# Altium PCB OsuBoard.PcbDoc
Units mil, origin at the board's own origin, x right, y up, seen from the top; angles counter-clockwise.
Board outline 3149.61 x 539.37 mil, 2 copper layers (Top Layer, Bottom Layer); 25 components, 20 nets, 114 pads, 53 vias.
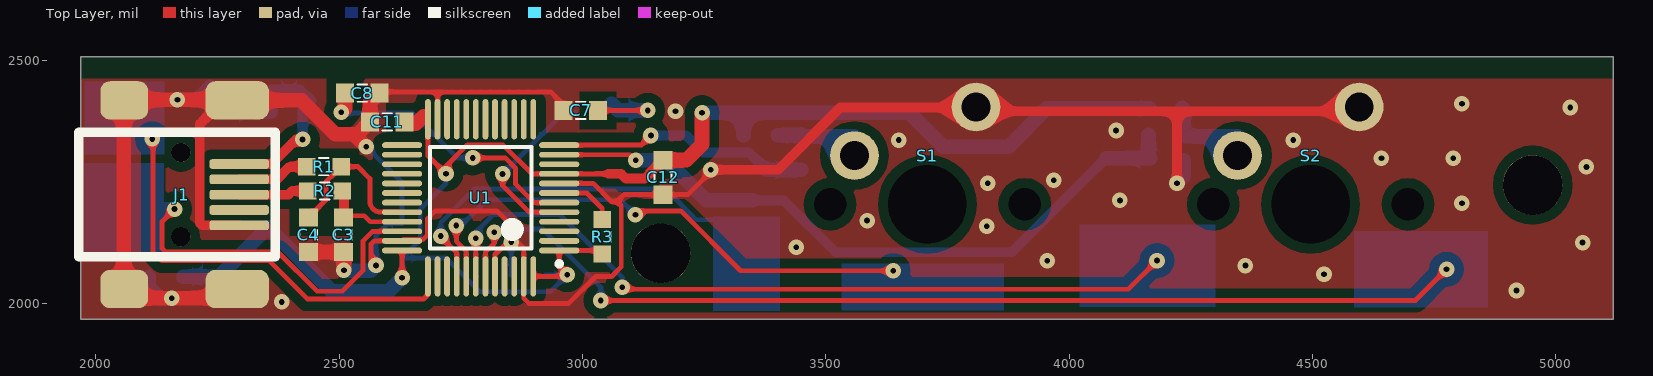
[diagram p0: Top Layer view]
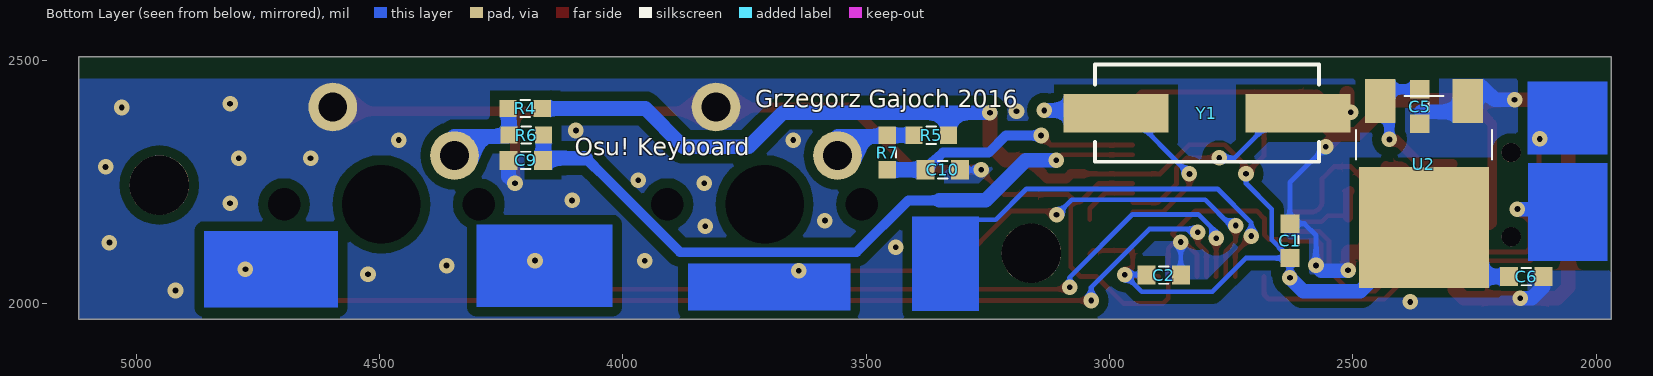
[diagram p1: Bottom Layer view, seen from below]
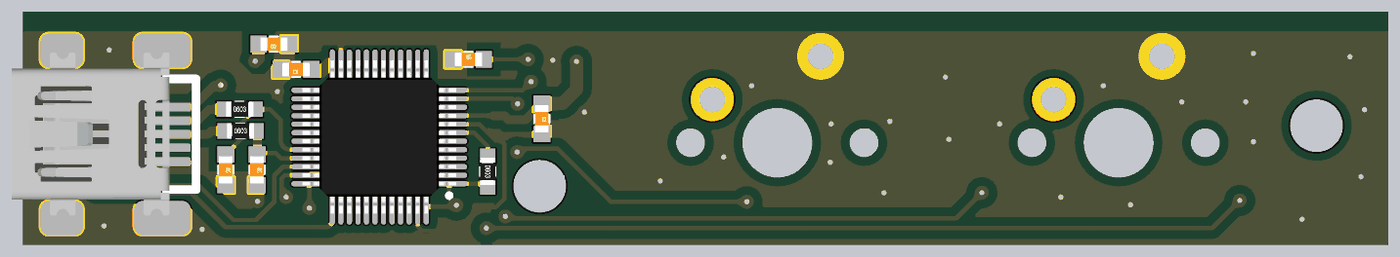
[diagram p2: 3D render of the assembled board from above, using the file's embedded part models]
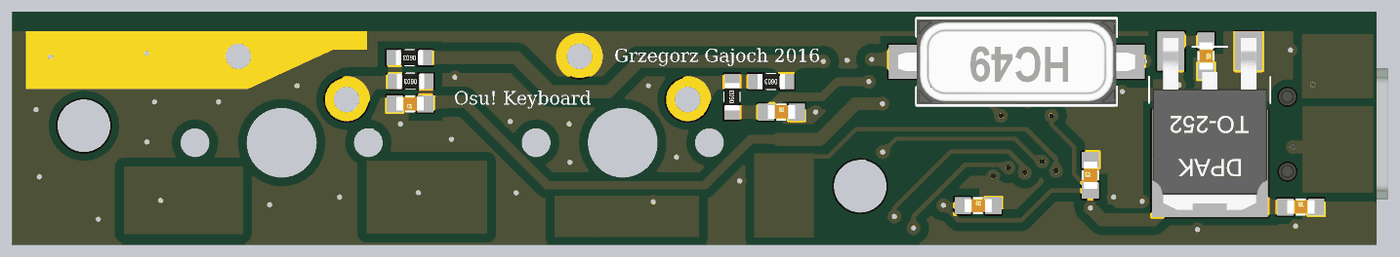
[diagram p3: 3D render of the assembled board from below, using the file's embedded part models]

## Layer stack, top to bottom
Top Solder: solder mask 0.4, Solder Resist, Dk 3.5
Top Layer: signal copper 1.4
Dielectric 1: dielectric 12.6, FR-4, Dk 4.8
Bottom Layer: signal copper 1.4
Bottom Solder: solder mask 0.4, Solder Resist, Dk 3.5

## Board outline
1968.5,1968.5 1968.5,2507.87 2027.56,2507.87 5118.11,2507.87 5118.11,1968.5

## Design rules (kind name [scope] priority, off if disabled: settings)
Clearance [All] p1: gap=6 except(20: Arc-Poly Track-Poly SMDPad-Poly THPad-Poly Via-Poly Fill-Poly Poly-Poly Poly-Region Poly-Text)
DiffPairsRouting [All] p1: maxlimit=10 minlimit=10 mostfreqgap=10 toplayer_minwidth=10 toplayer_maxwidth=50 toplayer_prefwidth=15 bottomlayer_minwidth=10 bottomlayer_maxwidth=50 bottomlayer_prefwidth=15 maxuncoupledlength=500
MinimumSolderMaskSliver [All] p1: minsoldermaskwidth=6
PolygonConnect [All] p1: connectstyle=Direct reliefconductorwidth=10 reliefentries=4 polygonreliefangle="90 Angle" airgapwidth=10
RoutingVias [All] p1: holewidth=11.81 width=32 viastyle="Through Hole" minholewidth=11.81 minwidth=32 maxholewidth=11.81 maxwidth=32
SilkToSolderMaskClearance [IsPad] p1: minsilkscreentomaskgap=0 clearancetoexposedcopper=TRUE
SolderMaskExpansion [All] p1: expansion=4
Width [All] p1: maxlimit=30 minlimit=10 preferedwidth=15 minimp=50.000000 maximp=50.000000 favimp=50.000000
27 further rules are at their usual default settings.

## Classes and differential pairs
differential pair USB: +USB_P -USB_N

## Components (designator, comment, footprint, x,y, rotation, side; value= is the part's Value field where it differs from the comment)
C1 "100n" C0603 2629.09,2129.42 r90 bottom
C2 "100n" C0603 2888.5,2059 r180 bottom
C3 "47p" C0603 2508.5,2142 r270 top
C4 "47p" C0603 2436.5,2142 r270 top
C5 "1u" C0603 2362.2,2405.51 r270 bottom
C6 "1u" C0603 2143.5,2056 r180 bottom
C7 "22p" C0603 2996.06,2397.64 r0 top
C8 "22p" C0603 2547.24,2433.07 r180 top
C9 "C" C0603 4199.5,2295 r0 bottom
C10 "C" C0603 3342.52,2275.59 r180 bottom
C11 "100n" C0603 2598.43,2374.02 r180 top
C12 "100n" C0603 3165.35,2259.84 r270 top
J1 "USB_MINI_B" USB_Mini_B_9.3x7.7 2289.37,2287.4 r0 top
R1 "22R" 0603 2468.5,2282 r0 top
R2 "22R" 0603 2470.5,2232 r0 top
R3 "10k" 0603 3040.5,2138 r270 top
R4 "R" 0603 4200.79,2401.57 r0 bottom
R5 "R" 0603 3366.14,2346.46 r0 bottom
R6 "R" 0603 4198.5,2347 r0 bottom
R7 "R" 0603 3456.69,2311.02 r90 bottom
S1 "SW-PB" "Cherry MX footprint" 3708.66,2204.72 r0 top
S2 "SW-PB" "Cherry MX footprint" 4496.06,2204.72 r0 top
U1 "STM32F103C8T6" QFP_48_0.5_M 2790.5,2218 r180 top
U2 "LD1117" TO-252 2353.5,2027 r0 bottom
Y1 "XTAL" HC49 2799.5,2392 r0 bottom

## Footprints (in the part's own frame and the unit in brackets; to place one, negate y for a bottom-side part, rotate by r counter-clockwise, add the part's x,y. Pads: shape width x height; smd on the part's side, far side on the other; paste and mask are expansions set on the pad)
0603 [mm] "SMD Resistor, Inch 0603, Metric 1608."
  rect 0.9x0.9 smd: 1(-0.9,0) 2(0.9,0)
  silkscreen extent -0.25,-0.45 0.25,0.45, body extent -0.8,-0.45 0.8,0.45, height 0.5
C0603 [mm] "SMD Capacitor, Inch 0603, Metric 1608."
  rect 0.95x1 smd: 1(-0.9,0) 2(0.9,0)
  silkscreen extent -0.25,-0.45 0.25,0.45, body extent -0.8,-0.4 0.8,0.4, height 0.3
"Cherry MX footprint" [mm]
  round 2.54 hole 1.5: 1(-3.81,2.54) 2(2.54,5.08)
  round 0 hole 1.7 unplated: A(-5.08,0) A(5.08,0)
  round 1.27 hole 4.1 unplated: ""(0,0)
HC49 [mm] "HC49, 2-Leads"
  rect 5.5x2 smd: 1(-4.75,0) 2(4.75,0)
  silkscreen extent -5.84,-2.54 5.84,2.54, body extent -6.95,-2.5 6.95,2.5, height 4.5
QFP_48_0.5_M [mm] "QFP, 48-Leads, Body 7x7mm, Pitch 0.5mm, IPC Low Density"
  oval 2.1x0.3 smd: 1(-4.1,2.75) 2(-4.1,2.25) 3(-4.1,1.75) 4(-4.1,1.25) 5(-4.1,0.75) 6(-4.1,0.25) 7(-4.1,-0.25) 8(-4.1,-0.75) 9(-4.1,-1.25) 10(-4.1,-1.75) 11(-4.1,-2.25) 12(-4.1,-2.75) 25(4.1,-2.75) 26(4.1,-2.25) 27(4.1,-1.75) 28(4.1,-1.25) 29(4.1,-0.75) 30(4.1,-0.25) 31(4.1,0.25) 32(4.1,0.75) 33(4.1,1.25) 34(4.1,1.75) 35(4.1,2.25) 36(4.1,2.75)
  oval 0.3x2.1 smd: 13(-2.75,-4.1) 14(-2.25,-4.1) 15(-1.75,-4.1) 16(-1.25,-4.1) 17(-0.75,-4.1) 18(-0.25,-4.1) 19(0.25,-4.1) 20(0.75,-4.1) 21(1.25,-4.1) 22(1.75,-4.1) 23(2.25,-4.1) 24(2.75,-4.1) 37(2.75,4.1) 38(2.25,4.1) 39(1.75,4.1) 40(1.25,4.1) 41(0.75,4.1) 42(0.25,4.1) 43(-0.25,4.1) 44(-0.75,4.1) 45(-1.25,4.1) 46(-1.75,4.1) 47(-2.25,4.1) 48(-2.75,4.1)
  silkscreen extent -4.23,-2.65 2.65,3.57, body extent -4.5,-4.5 4.5,4.5, height 1.46
TO-252 [mm] "JEDEC standard. TO-252, variant AA."
  rect 1.6x2.3 smd: 1(-2.286,-9.906) 3(2.286,-9.906)
  rect 6.8x6.3 smd: 4(0,-3.302)
  silkscreen extent -3.56,-10.16 3.56,-6.86, body extent -3.37,-10.67 3.37,-0.57, height 2.37
USB_Mini_B_9.3x7.7 [mm] "Mini USB Connector, 9.3x7.7mm, SMT, Righer Angle"
  rrect50% 3.1x0.5 smd mask+0.025: 1(0.125,0) 2(0.125,-0.8) 3(0.125,-1.6) 4(0.125,-2.4) 5(0.125,-3.2)
  rrect50% 2.5x2 smd: MH1(-5.875,-6.525) MH4(-5.875,3.325)
  rrect50% 3.3x2 smd: MH2(0.025,-6.525) MH3(0.025,3.325)
  round 1 hole 1 unplated: X(-2.925,-3.8) Y(-2.925,0.6)
  silkscreen extent -8.25,-4.85 2,1.65, body extent -8.82,-6.39 0.43,3.21, height 4.05

## Part data
C1 C2 C3 C4 C5 C6 C7 C8 C9 C10 C11 C12: library part Cap, "Generic capacitor"
J1: library part USB_MINI_B2, "USB On-The-Go (OTG) Mini-B Receptacle"
R1 R2 R3 R4 R5 R6 R7: library part Res, "Generic resistor"
S1 S2: "Switch"
U1: "ARM Cortex-M3 32-bit MCU, 64 KB Flash, 20 KB Internal RAM, 37 I/Os, 48-pin LQFP, -40 to 85 degC, Tray"
U2: "Low drop positive voltage regulator"
Y1: "Crystal Oscillator"

## Free pads (board coordinates)
  round 122.05 hole 122.05 unplated: 2(3160.5,2104) 2(4952.5,2244.09)

## Via types
v1: diameter 32, hole 11.81, Top Layer to Bottom Layer, tented both sides, 53 vias

## Nets (pads, with @x,y where several pads share a name; then routed paths per layer and width w, separated by ;. In a path a pad name is that pad's centre, name@x,y a point inside that pad or via, vN(x,y) a via of type N, cw(c..) or ccw(c..) an arc to the next point about the centre after c; other vN are vias at no path point)
3V3: C1.1 C2.1 C6.1 C11.1 C12.1 R3.2 R4.1 R5.1 U1.1 U1.9 U1.24 U1.36 U1.48 U2.4 | length 3391.3
  Top Layer w10: v1(2629.09,2053.58) U1.36 ; U1.24 2682.24,2304.27 v1(2719.29,2267.21) 2719.29,2282.97 2763.32,2327 2836.32,2327 2896.1,2267.21 U1.9 3053.29,2267.21 ; U1.48 2965.09,2056.58 v1(2968.5,2060) 2951.92,2076.58 U1.1 3033.34,2109.73 R3.2
  Top Layer w20: 3053.29,2267.21 3079.24,2267.21 3088.58,2257.87 3127.95,2257.87 C12.1
  Top Layer w30: C11.1@2641.73,2370.08 2657.48,2370.08 2673.23,2385.83 ; C12.1@3162.11,2295.28 C12.1 3212.6,2295.28 3245.5,2328.18 v1(3245.5,2393)
  Bottom Layer w10: v1(2629.09,2053.58) C1.1 ; v1(2719.29,2267.21) 2719.29,2247.63 2666.5,2194.84 2666.5,2131.4 C1.1 ; C2.1 2924.94,2060 v1(2968.5,2060) 2933.5,2025 2788.5,2025 2719.52,2093.98 C1.1
  Bottom Layer w30: C6.1 2252.5,2056 U2.4 2484.5,2026 2601.5,2026 v1(2629.09,2053.58) ; v1(3245.5,2393) 3330.71,2393 ; R5.1 3330.71,2393 ; R4.1 3954.08,2401.57 3875.34,2322.83 3741.67,2322.83 3671.5,2393 3330.71,2393
5V: C5.1 J1.1 U2.3 | length 332
  Top Layer w20: J1.1 2360.24,2287.4 2410.83,2338 v1(2424.5,2338)
  Bottom Layer w20: C5.1@2359.5,2440.94 C5.1 2419.56,2440.94 U2.3 2424.5,2398 v1(2424.5,2338)
GND: C1.2 C2.2 C3.2 C4.2 C5.2 C6.2 C7.1 C8.1 C9.2 C10.2 C11.2 C12.2 J1.5 J1.MH1 J1.MH2 J1.MH3 J1.MH4 S1.2 S2.2 U1.8 U1.23 U1.35 U1.44 U1.47 U2.1 | length 6051.7
  Top Layer w10: v1(2555.5,2323) v1@2555.5,2335.03 ; C8.1@2574.8,2425.2 C8.1 ; v1(2575.5,2079) 2565.5,2089 2565.5,2123 2571.92,2129.42 U1.35 2631.87,2132.2 2671.52,2132.2 2681.43,2142.1 2681.43,2175.11 2697.32,2191 2823.5,2191 2870.5,2144 v1(2853.5,2127) ; C8.1@2582.68,2435.58 2701.92,2435.58 ; U1.23 2701.92,2435.58 ; U1.44 2820.03,2101.53 2845.5,2127 v1(2853.5,2127) ; U1.8 3021.98,2247.53 3059.5,2210 3070.5,2210 ; C7.1 2960.63,2409.45 2934.5,2435.58 2701.92,2435.58 ; v1@3267.72,2275.59 3216.54,2224.41 C12.2 3084.91,2224.41 3070.5,2210 ; v1(2853.5,2127) 2866.5,2127 2879.09,2114.42 U1.47 2879.09,2011.42 2889.5,2001 2971.5,2001 3026.5,2056 3059.5,2056 3079.5,2076 3079.5,2201 3070.5,2210
  Top Layer w20: J1.MH3@2260.83,2417.32 2213.5,2370 2213.5,2166.42 2218.5,2161.42 J1.5 ; J1.MH2@2289.37,2058.07 2289.37,2031.5 J1.MH2 ; v1(3263.45,2275.59) 3267.72,2275.59 3401.57,2275.59 3529.53,2403.54 3847.02,2403.54 3854.9,2395.67 4221.5,2395.67 ; v1(4221.5,2248) 4221.5,2395.67 ; S2.2@4596.06,2444.09 4547.64,2395.67 4221.5,2395.67
  Top Layer w30: J1.MH2 2271.66,2011.81 v1(2155.51,2011.81) 2079.69,2011.81 2057.09,2034.42 2057.09,2419.29 v1(2167.32,2419.29) J1.MH3@2290.36,2419.29 ; J1.MH3 2422.24,2418.31 2492.13,2348.43 2530.08,2348.43 ; C4.2 C3.2 2509.5,2105.57 v1(2509.5,2069) ; v1(2555.5,2323) 2530.08,2348.43 ; C8.1@2574.8,2425.2 2562.99,2413.39 C11.2 2537.4,2348.43 2530.08,2348.43
  Bottom Layer w10: v1(2555.5,2323) 2629.09,2249.42 C1.2 2599.35,2164.85 2575.5,2141 v1(2575.5,2079) ; C2.2 2853.5,2059.43 v1(2853.5,2127) ; v1(3263.45,2275.59) C10.2
  Bottom Layer w30: C6.2 2108.07,2035.63 2131.89,2011.81 v1(2155.51,2011.81) ; v1(2167.32,2419.29) 2208.06,2419.29 2234.64,2445.87 U2.1 2285.94,2394.57 2359.5,2394.57 ; v1(2509.5,2069) 2509.5,2068 2564.5,2068 v1(2575.5,2079) ; v1(4221.5,2248) 4234.94,2261.43 C9.2
  other v1: 2381.89,2003.94 4919.29,2027.56 4523.62,2061.02 4362.2,2078.74 3954.72,2088.58 3438.98,2116.14 5055.12,2125.98 3830.71,2159.45 3584.65,2171.26 4807.09,2206.69 4104.33,2212.6 3832.68,2248.03 3968.5,2253.94 5062.99,2281.5 4641.73,2299.21 4789.37,2299.21 3649.61,2336.61 4460.63,2336.61 4096.46,2356.3 3190.94,2395.67 5029.53,2403.54 4807.09,2411.42
NetC7_2: C7.2 U1.5 Y1.2 | length 542.3
  Top Layer w10: v1(2835.5,2267) 2835.5,2243 2890.03,2188.47 U1.5 ; C7.2@3043.07,2401.57 3047,2397.64 v1(3133.86,2397.64)
  Bottom Layer w10: v1(2835.5,2267) 2960.5,2392 Y1.2
  Bottom Layer w30: Y1.2@3056.5,2408 3059.5,2411 3072.87,2397.64 v1(3133.86,2397.64)
NetC8_2: C8.2 U1.6 Y1.1 | length 586.1
  Top Layer w10: v1(2774.5,2300) 2840.69,2300 2862.5,2278.18 2862.5,2246.18 2900.53,2208.16 U1.6
  Top Layer w30: v1(2504.07,2393.57) 2511.81,2401.31 C8.2
  Bottom Layer w10: v1(2504.07,2393.57) 2505.64,2392 Y1.1 2650.5,2392 2742.5,2300 v1(2774.5,2300)
NetJ1_2: J1.2 R1.1 | length 151.7
  Top Layer w20: J1.2 2372.05,2255.9 2398.14,2282 R1.1 R1.1@2431.61,2283.46
NetJ1_3: J1.3 R2.1 | length 143.9
  Top Layer w20: J1.3 2395.67,2224.41 2403.26,2232 R2.1
NetR3_1: R3.1 U1.7 | length 124.3
  Top Layer w10: U1.7 3008.66,2227.84 3040.5,2196 R3.1
NetR4_2: R4.2 R6.2 S2.1 | length 169.5
  Bottom Layer w30: R4.2@4232.5,2402.57 4233.94,2401.13 R6.2 4236.84,2344.09 S2.1@4346.06,2344.09
NetR5_2: R5.2 R7.2 S1.1 | length 159.5
  Bottom Layer w30: R5.2 3446.99,2346.46 3448.69,2348.15 3452.74,2344.09 S1.1@3558.66,2344.09
PIN1: C9.1 R6.1 U1.11 | length 1426.5
  Top Layer w10: U1.11 3097.92,2306.58 v1(3109.5,2295)
  Bottom Layer w20: 3349.8,2212.6 3413.39,2212.6 3519.69,2106.3 3882.8,2106.3 4075.94,2299.43
  Bottom Layer w30: v1(3109.5,2295) 3171.5,2295 3253.91,2212.6 3349.8,2212.6 ; 4075.94,2299.43 4166.5,2299.43 4163.07,2302.87 R6.1
PIN2: C10.1 R7.1 U1.12 | length 534.2
  Top Layer w10: U1.12 3120.77,2326.27 v1(3140.5,2346)
  Bottom Layer w20: v1(3140.5,2346) 3213.06,2346 3247.78,2311.28 3342.27,2311.28 C10.1
  Bottom Layer w30: C10.1 R7.1@3448.82,2275.59
PIN3: U1.40 | length 788.8
  Top Layer w10: v1(2708.43,2139.34) 2708.43,2139.92 2707.5,2139 2741.29,2105.21 U1.40
  Bottom Layer w10: v1(2708.43,2139.34) 2708.43,2167.1 2777.32,2236 3170.5,2236 3233.5,2173 3316.5,2173
PIN4: U1.41 | length 1100
  Top Layer w10: v1(2740.5,2161) 2740.5,2128.63 2760.98,2108.16 U1.41 ; v1(3108.5,2183) 3116.5,2191 3201.5,2191 3324.5,2068 v1(3638.5,2068)
  Bottom Layer w10: v1(2740.5,2161) 2750.32,2161 2803.32,2214 3077.5,2214 3102.5,2189 v1@3096.5,2183
PIN5: U1.42 | length 1606.4
  Top Layer w10: v1(2780.5,2135) 2780.5,2056.74 U1.42 ; v1(3081.5,2034) 3085.5,2030 4121.5,2030 v1(4180.5,2089)
  Bottom Layer w10: v1(2780.5,2135) 2780.5,2147.18 2817.32,2184 2952.5,2184 3081.5,2055 v1(3081.5,2034)
PIN6: U1.43 | length 2161.1
  Top Layer w10: U1.43 2800.35,2105.84 2818.5,2124 v1(2818.5,2147) ; v1(3037.5,2007) 4711.5,2007 v1(4775.5,2071)
  Bottom Layer w10: v1(2818.5,2147) 2825.5,2154 2917.5,2154 3037.5,2034 v1(3037.5,2007)
SWCLK: U1.37 | length 879.7
  Top Layer w10: v1(2115.5,2339) 2117.5,2337 2117.5,2106.3 2135.22,2088.58 2356.3,2088.58 2435.04,2009.84 2673.23,2009.84 2682.24,2018.85 U1.37
SWDIO: U1.34 | length 763.1
  Top Layer w10: v1(2161.42,2194.88) 2135.83,2169.29 2135.83,2114.17 2143.7,2106.3 2374.02,2106.3 2454.47,2025.84 2506.35,2025.84 2548.5,2068 2548.5,2129 2568.61,2149.1 U1.34
  Bottom Layer w30: 2106.3,2194.88 v1(2161.42,2194.88)
USB_N: C4.1 R1.2 U1.32 | length 327.3
  Top Layer w10: C4.1 2472.5,2213.43 2472.5,2250.57 R1.2 2538.5,2282 2562.99,2257.51 2562.99,2210.63 ccw(c2585.15,2210.63) 2585.15,2188.47 U1.32
USB_P: C3.1 R2.2 U1.33 | length 193.8
  Top Layer w10: R2.2 R2.2@2516.5,2232 ; C3.1 2509.5,2177.43 2513.17,2181.1 2551.18,2181.1 2563.5,2168.79 U1.33
  Top Layer w20: R2.2 2509.5,2228.43 C3.1@2509.5,2177.43
pads on no net: J1.4 J1.X J1.Y S1. S1.A S2. S2.A U1.2 U1.3 U1.4 U1.10 U1.13 U1.14 U1.15 U1.16 U1.17 U1.18 U1.19 U1.20 U1.21 U1.22 U1.25 U1.26 U1.27 U1.28 U1.29 U1.30 U1.31 U1.38 U1.39 U1.45 U1.46

## Polygon pours and split planes (outlines as drawn)
GND on Bottom Solder "Bottom GND" (solid, pour order 0): 5086.61,2462.6 4299.21,2462.6 4299.21,2420 4377.42,2420 4574.5,2329 5086.61,2329
GND on Bottom Layer "GND_L02_P006" (solid, remove dead copper, pour order 6): 5118.11,2462.6 1968.5,2462.6 1968.5,1968.5 5118.11,1968.5
GND on Top Layer "GND_L01_P008" (solid, remove dead copper, pour order 8): 5118.11,1968.5 5118.11,2462.6 1968.5,2462.6 1968.5,1968.5

## Other copper
Bottom Layer:
  rectangle net PIN4: 3532.5,1986 3866.5,2082.68
  rectangle net PIN6: 4585.5,1993 4860.5,2149.61
  rectangle net PIN5: 4021.5,1994 4300.5,2163
  rectangle net PIN3: 3267.5,1985 3405.51,2180
  region net SWCLK: 2140.5,2456.69 1976.38,2456.69 1976.38,2307 2140.5,2307
  region net SWDIO: 2139.5,2290 1976.38,2290 1976.38,2088.58 2139.5,2088.58

## Silkscreen, mask and mechanical layers (free items; w line width, h text height)
Bottom Overlay:
  text "Grzegorz Gajoch 2016" at 3728.35,2391.73 h60
  text "Osu! Keyboard" at 4098.43,2293.31 h60
Mechanical 1:
  lines w5: 1968.5,1968.5 5118.11,1968.5 5118.11,2488.19 ; 5118.11,2519.69 5118.11,2488.19 ; 5118.11,2488.19 5118.11,2488.19